# Altium PCB RC_Car.PcbDoc
Units mm, origin at the board's own origin, x right, y up, seen from the top; angles counter-clockwise.
Board outline 99.69 x 74.68 mm, 2 copper layers (Top Layer, Bottom Layer); 21 components, 34 nets, 97 pads, 18 vias.
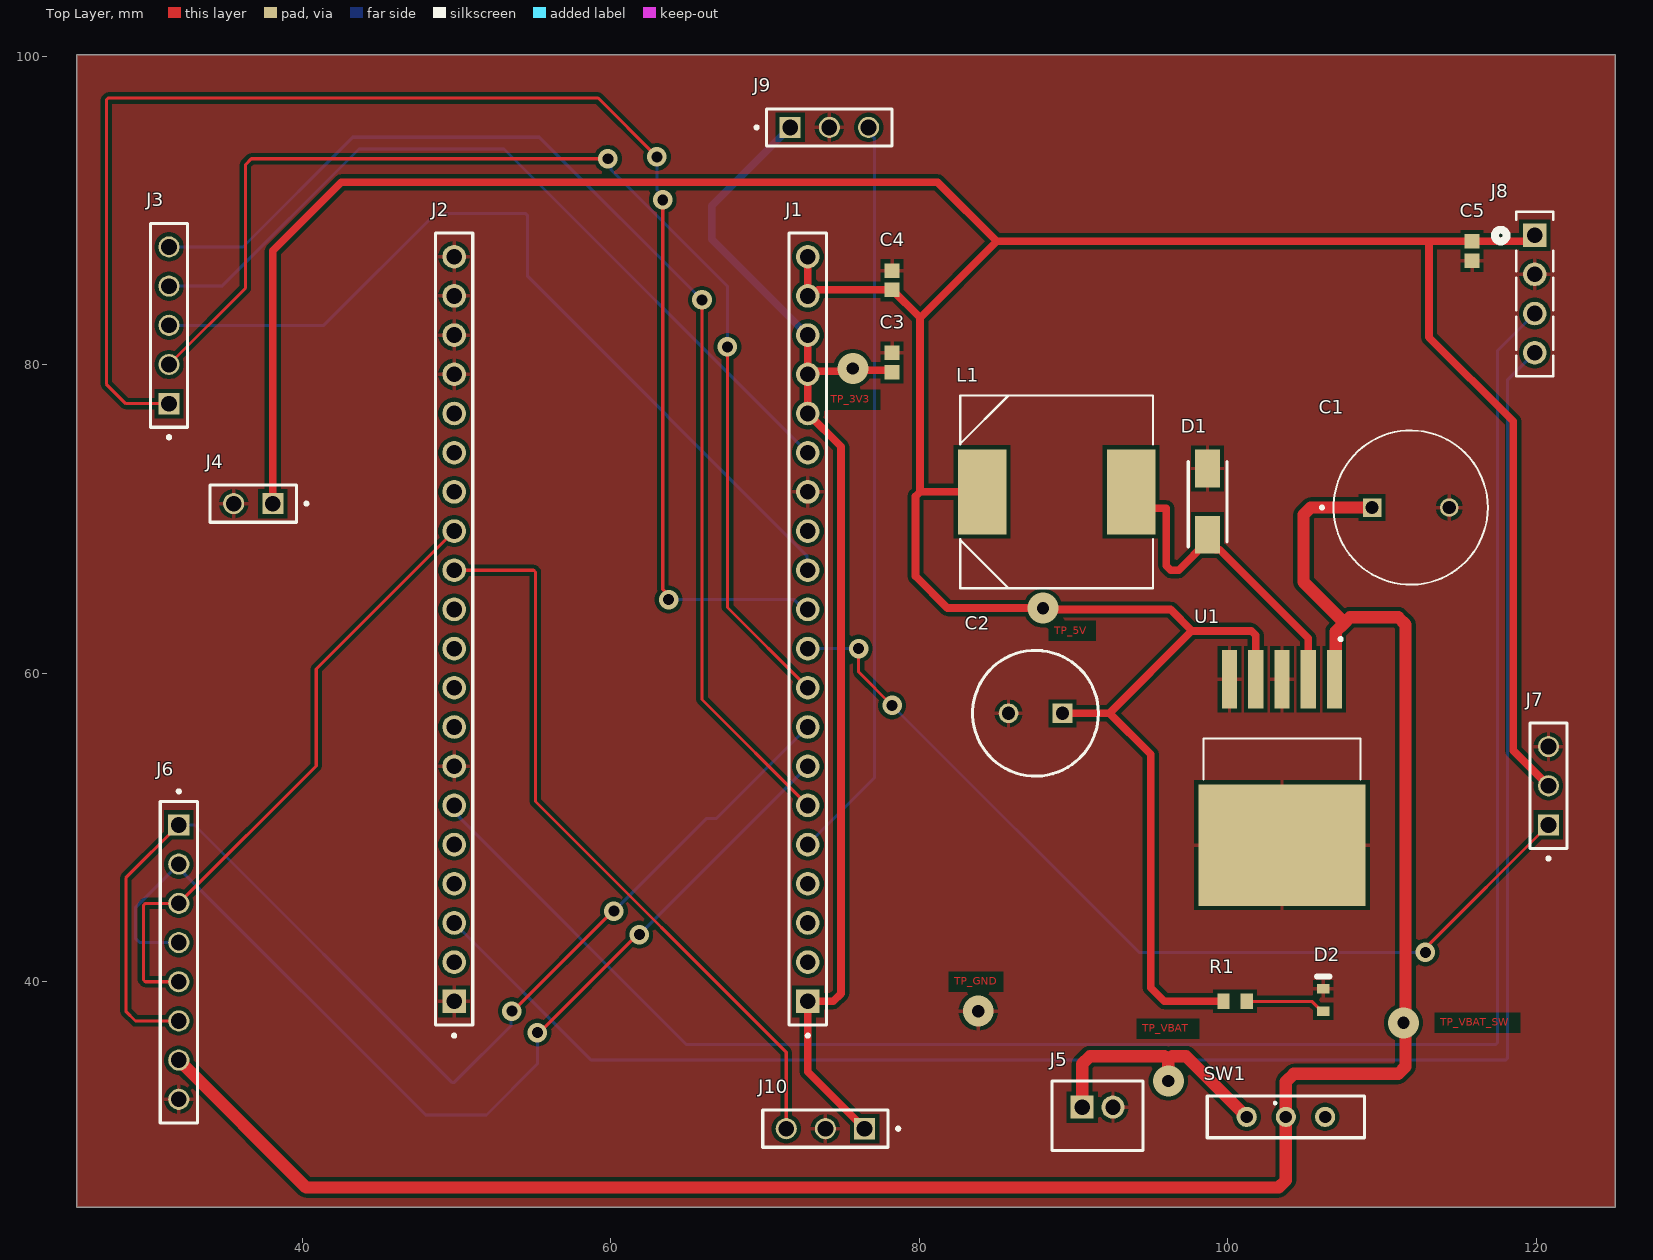
[diagram p0: Top Layer view]
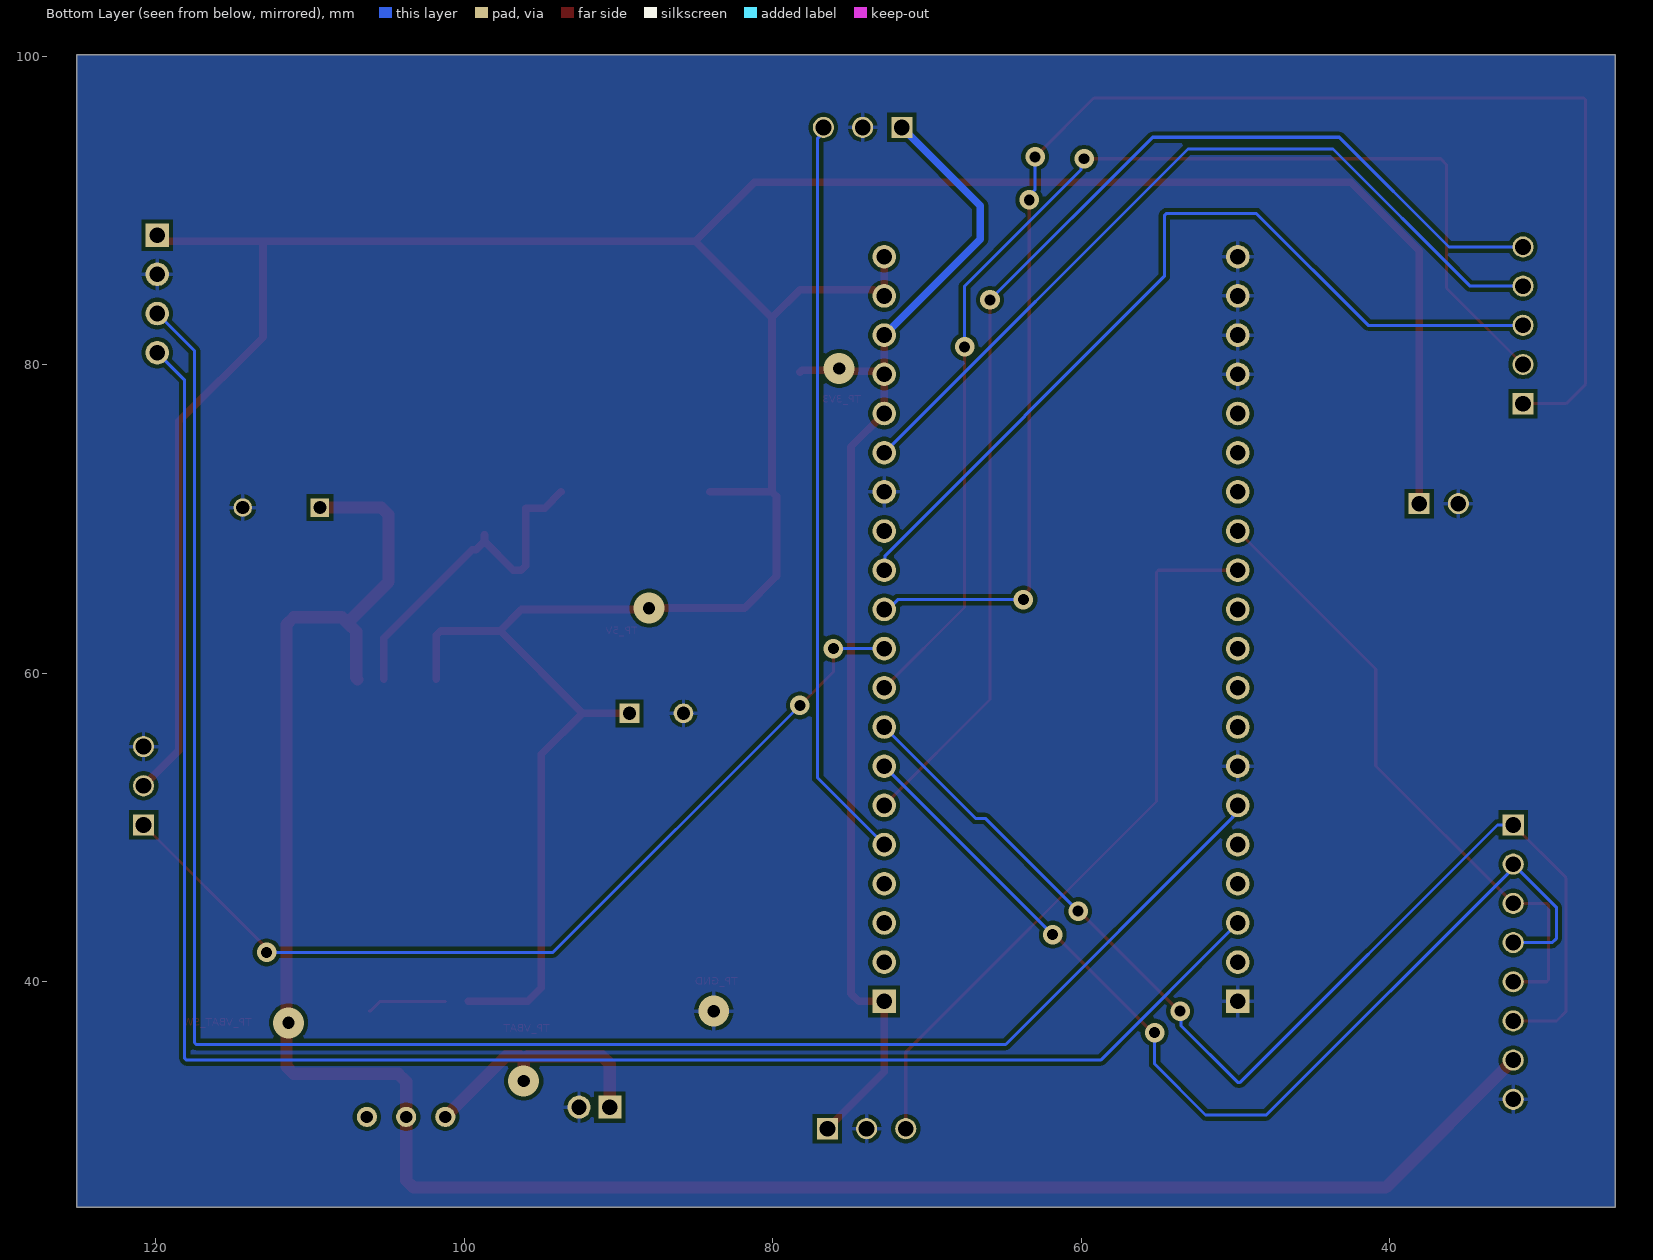
[diagram p1: Bottom Layer view, seen from below]

## Layer stack, top to bottom
Top Solder: solder mask 0.0102, Solder Resist, Dk 3.5
Top Layer: signal copper 0.0356
Dielectric 1: dielectric 0.32, FR-4, Dk 4.8
Bottom Layer: signal copper 0.0356
Bottom Solder: solder mask 0.0102, Solder Resist, Dk 3.5

## Board outline
25.4,25.4 25.4,100.076 125.095,100.076 125.095,25.4

## Design rules (kind name [scope] priority, off if disabled: settings)
Clearance [All] p1: gap=0.254 ignorepadtopadclearanceinfootprint=FALSE
PolygonConnect [All] p1: connectstyle=Relief reliefconductorwidth=0.254 reliefentries=4 polygonreliefangle="90 Angle" airgapwidth=0.254
RoutingVias [All] p1: holewidth=0.711 width=1.27 viastyle="Through Hole" minholewidth=0.711 minwidth=1.27 maxholewidth=0.711 maxwidth=1.27
SolderMaskExpansion [All] p1: expansion=0.102 istentingtop=FALSE
Width [All] p1: maxlimit=2 minlimit=0.2 preferedwidth=0.2 minimp=50.000000 maximp=50.000000 favimp=50.000000
30 further rules are at their usual default settings.

## Components (designator, comment, footprint, x,y, rotation, side; value= is the part's Value field where it differs from the comment)
C1 "EEUFM1E681" CAPPRD500W60D1000H2000 111.847,70.739 r0 top
C2 "EEU-FC1E471" CAPPRD350W65D815H2200 89.281,57.404 r180 top
C3 "Capacitor 100 nF +/-10% 50 V 0603" CAPC1608X90X40NL10T20 78.232,80.137 r90 top value=100nF
C4 "Capacitor 100 nF +/-10% 50 V 0603" CAPC1608X90X40NL10T20 78.232,85.471 r90 top value=100nF
C5 "Capacitor 100 nF +/-10% 50 V 0603" CAPC1608X90X40NL10T20 115.824,87.366 r90 top value=100nF
D1 "CDBA540-HF" DIOM5225X250N 98.679,71.12 r90 top
D2 "TLMS1100-GS08" VISH-TLMX1100_V 106.172,38.825 r90 top
J1 "ESP32 Left Header" SAMTEC_SSQ-120-XX-X-S 72.771,62.865 r90 top
J2 "ESP32 Right Header" SAMTEC_SSQ-120-XX-X-S 49.851,62.865 r90 top
J3 "nRF24 Signals" SAMTEC_SSQ-105-02-T-S 31.369,82.55 r90 top
J4 "nRF24 Power" SAMTEC_SSQ-102-02-T-S 36.83,70.993 r180 top
J5 "Battery Connector" JST-B2B-PH-K-S_V 91.551,31.327 r0 top
J6 "L298N" SAMTEC_SSQ-108-02-T-S 32.004,41.275 r270 top
J7 "Servo Motor" SAMTEC_SSQ-103-02-T-S 120.777,52.705 r90 top
J8 "Tof Sensor" SAMTEC_SSQ-104-02-T-S 119.888,80.772 r270 top
J9 "IR Sensor Left" SAMTEC_SSQ-103-02-T-S 74.168,95.377 r0 top
J10 "IR Sensor Right" SAMTEC_SSQ-103-02-T-S 73.914,30.48 r180 top
L1 "DR127-220-R" INDM125125X800N 88.9,71.755 r0 top
R1 "RC0603JR-13150RL" RESC1608X55X25ML10T15 100.469,38.735 r0 top
SW1 "Power Switch" 450301014042 103.759,31.242 r0 top
U1 "LM2596S-5.0" TO170P1524X483-6N 103.505,53.213 r270 top

## Footprints (in the part's own frame and the unit in brackets; to place one, negate y for a bottom-side part, rotate by r counter-clockwise, add the part's x,y. Pads: shape width x height; smd on the part's side, far side on the other; paste and mask are expansions set on the pad)
450301014042 [mm]
  round 1.308 hole 0.8: 1(0,0) 2(-2.54,0) 3(2.54,0)
  silkscreen extent -5.1,-1.35 5.1,1.35
CAPC1608X90X40NL10T20 [mm] "Chip Capacitor, 2-Leads, Body 1.70x0.90mm, IPC Medium Density"
  rect 0.95x0.95 smd: 1(-0.625,0) 2(0.625,0)
  body extent -0.85,-0.45 0.85,0.45, height 0.9
CAPPRD350W65D815H2200 [mm]
  rect 1.275x1.275 hole 0.85: 1(0,0)
  round 1.275 hole 0.85: 2(3.5,0)
  silkscreen extent -2.33,-4.07 5.82,4.07, body extent -2.49,-4.25 6,4.25, height 22
CAPPRD500W60D1000H2000 [mm]
  round 1.2 hole 0.85: N(2.5,0)
  rect 1.2x1.2 / inner round 1.2 / far side rect 1.2x1.2 hole 0.85: P(-2.5,0)
  silkscreen extent -5.85,-5 5,5, body extent -5,-5 5,5, height 20
DIOM5225X250N [mm]
  rect 2.45x1.6 smd: 1(-2.15,0) 2(2.15,0)
  silkscreen extent -2.95,-1.25 2.6,1.25, body extent -2.6,-1.25 2.6,1.25, height 2.5
INDM125125X800N [mil]
  rect 124x217 smd: 1(-190,0) 2(190,0)
  silkscreen extent -246,-246 246,246
JST-B2B-PH-K-S_V [mm] "Connector, 2-Leads, Body 5.9x4.5mm, Pitch 2mm"
  rect 1.5x1.5 hole 1: 1(-1,0.55)
  round 1.5 hole 1: 2(1,0.55)
  silkscreen extent -2.95,-2.25 2.95,2.25, body extent -2.95,-2.25 2.95,2.25, height 6
RESC1608X55X25ML10T15 [mm] "Chip Resistor, 2-Leads, Body 1.60x0.80mm, IPC Low Density"
  rect 0.8x1 smd: 1(-0.75,0) 2(0.75,0)
  body extent -0.85,-0.45 0.85,0.45, height 0.55
SAMTEC_SSQ-102-02-T-S [mm]
  rect 1.37x1.37 hole 1.02: 01(-1.27,0)
  round 1.37 hole 1.02: 02(1.27,0)
  silkscreen extent -3.54,-1.2 2.8,1.2
SAMTEC_SSQ-103-02-T-S [mm]
  rect 1.37x1.37 hole 1.02: 01(-2.54,0)
  round 1.37 hole 1.02: 02(0,0) 03(2.54,0)
  silkscreen extent -4.81,-1.2 4.07,1.2
SAMTEC_SSQ-104-02-T-S [mil]
  rect 60x60 hole 40: 1(-300,0)
  round 60 hole 40: 2(-200,0) 3(-100,0) 4(0,0)
  silkscreen extent -360,-102 60,47
SAMTEC_SSQ-105-02-T-S [mm]
  rect 1.37x1.37 / inner round 1.37 / far side rect 1.37x1.37 hole 1.02: 01(-5.08,0)
  round 1.37 hole 1.02: 02(-2.54,0) 03(0,0) 04(2.54,0) 05(5.08,0)
  silkscreen extent -7.35,-1.2 6.61,1.2
SAMTEC_SSQ-108-02-T-S [mm]
  rect 1.37x1.37 / inner round 1.37 / far side rect 1.37x1.37 hole 1.02: 01(-8.89,0)
  round 1.37 hole 1.02: 02(-6.35,0) 03(-3.81,0) 04(-1.27,0) 05(1.27,0) 06(3.81,0) 07(6.35,0) 08(8.89,0)
  silkscreen extent -11.16,-1.2 10.42,1.2
SAMTEC_SSQ-120-XX-X-S [mm]
  rect 1.53x1.53 / inner round 1.53 / far side rect 1.53x1.53 hole 1.02: 01(-24.13,0)
  round 1.53 hole 1.02: 02(-21.59,0) 03(-19.05,0) 04(-16.51,0) 05(-13.97,0) 06(-11.43,0) 07(-8.89,0) 08(-6.35,0) 09(-3.81,0) 10(-1.27,0) 11(1.27,0) 12(3.81,0) 13(6.35,0) 14(8.89,0) 15(11.43,0) 16(13.97,0) 17(16.51,0) 18(19.05,0) 19(21.59,0) 20(24.13,0)
  silkscreen extent -26.45,-1.2 25.66,1.2
TO170P1524X483-6N [mm]
  rect 3.79x0.99 smd: 1(-6.4,3.4) 2(-6.4,1.7) 3(-6.4,0) 4(-6.4,-1.7) 5(-6.4,-3.4)
  rect 7.88x10.84 smd paste-6: 6(4.35,0)
  silkscreen extent -9.1,-5.08 0.09,5.08, body extent -7.18,-5.08 7.18,5.08, height 4.65
VISH-TLMX1100_V [mm] "SMD, 2-Leads, Body 1.6x0.8mm"
  rect 0.6x0.8 smd: 1(-0.725,0) 2(0.725,0)
  silkscreen extent 1.53,-0.4 1.53,0.4, body extent -0.8,-0.4 0.8,0.4, height 0.65

## Part data
C1: "680F 25V Aluminum Electrolytic Capacitors Radial, Can 5000 Hrs @ 105C", Package="RADIAL-2 Panasonic", Check_prices=https://www.snapeda.com/parts/EEUFM1E681/Panasonic/view-part/?ref=eda, Digi-Key_Part_Number=P12390-ND, MF=Panasonic, MP=EEUFM1E681, Purchase-URL=https://pricing.snapeda.com/search?q=EEUFM1E681&ref=eda, SnapEDA_Link=https://www.snapeda.com/parts/EEUFM1E681/Panasonic/view-part/?ref=snap
C2: "Capacitor Polarised", Manufacturer_Name=Panasonic, Mouser Part Number=667-EEU-FC1E471, Arrow Part Number=EEU-FC1E471, Arrow Price/Stock=https://www.arrow.com/en/products/eeu-fc1e471/panasonic?region=europe, Datasheet Link=http://industrial.panasonic.com/cdbs/www-data/pdf/RDF0000/ABA0000C1209.pdf, Height=22mm, Manufacturer_Part_Number=EEU-FC1E471, Mouser Price/Stock=https://www.mouser.co.uk/ProductDetail/Panasonic/EEU-FC1E471?qs=%2FUrJKH1balAe6BYeommeDg%3D%3D
C3 C4 C5: library part CMP-001-00017-6, "Chip Capacitor, 100 nF, +/- 10%, 50 V, 0603 (1608 Metric)", Capacitor Type=Ceramic, Case/Package=0603, Max Operating Temperature=125°C, Min Operating Temperature=-55°C, Tolerance=10%, Voltage Rating=50V, Mounting Technology=SM, Pins=2, RoHS Compliant=True
D1: "Schottky Diode", Manufacturer_Name="Comchip Technology", Mouser Part Number=750-CDBA540-HF, Arrow Part Number=CDBA540-HF, Arrow Price/Stock=https://www.arrow.com/en/products/cdba540-hf/comchip-technology?region=nac, Datasheet Link=https://datasheet.datasheetarchive.com/originals/distributors/DKDS-12/228866.pdf, Height=2.5mm, Manufacturer_Part_Number=CDBA540-HF, Mouser Price/Stock=https://www.mouser.co.uk/ProductDetail/Comchip-Technology/CDBA540-HF?qs=XEIV%2Fho1H6f2kHo2SATLRw%3D%3D
D2: library part CMP-007-00030-2, "Red Led, 20mA, 2.1 V, -40 to 100 degC, 2-Pin SMD (0603), RoHS, Tape and Reel", Case/Package=0603, Colour=Red, Forward Current=20mA, Forward Voltage=2.1V, Manufacturer="Vishay Semiconductor", Max Operating Temperature=100°C, Min Operating Temperature=-40°C, Package Description="2-Pin Surface Mount Device, Body 1.6 x 0.8 mm", Package Quantity=3000, Package Reference=TLMX1100, Power=90mW, Datasheet URL=http://www.vishay.com/docs/83173/tlmb1100.pdf, Datasheet Version="Rev. 2.7, 03/2016", Illumination Colour=Red, Lens Style=Clear, Luminous Intensity=63mcd, Manufacturer URL=http://www.vishay.com/, Mounting Technology=SM, Nominal Vf=2.1V, Packaging=TapeandReel, Pins=2, RoHS Compliant=True, Viewing Angle=160degrees
J1 J2: library part SSQ-120-XX-X-S, "20 Position Receptacle Connector 0.100 (2.54mm) Through Hole Gold", Package=None, Check_prices=https://www.snapeda.com/parts/SSQ-120-22-F-S/Samtec/view-part/?ref=eda, MF=Samtec, MP=SSQ-120-22-F-S, SnapEDA_Link=https://www.snapeda.com/parts/SSQ-120-22-F-S/Samtec/view-part/?ref=snap
J3: library part SSQ-105-02-T-S, "Headers & Wire Housings .100 Tiger Buy Socket Strip, Square Tail", Package=None, Check_prices=https://www.snapeda.com/parts/SSQ-105-02-T-S/Samtec/view-part/?ref=eda, MF=Samtec, MP=SSQ-105-02-T-S, SnapEDA_Link=https://www.snapeda.com/parts/SSQ-105-02-T-S/Samtec/view-part/?ref=snap
J4: library part SSQ-102-02-T-S, "SSQ Series .100 Tiger Buyâ„¢ Socket Strip, Square Tail", Package=None, Availability="In Stock", Check_prices=https://www.snapeda.com/parts/SSQ-102-02-T-S/Samtec+Inc./view-part/?ref=eda, MF="Samtec Inc.", MP=SSQ-102-02-T-S, Price=None, Purchase-URL=https://pricing.snapeda.com/search/part/SSQ-102-02-T-S/?ref=eda, SnapEDA_Link=https://www.snapeda.com/parts/SSQ-102-02-T-S/Samtec+Inc./view-part/?ref=snap
J5: library part CMP-2000-05162-1, "Male Header, Pitch 2 mm, 1 x 2 Position, Height 6 mm, Tail Length 3.4 mm, -25 to 85 degC, RoHS, Bulk", Manufacturer=JST, Datasheet URL=http://datasheet.octopart.com/B2B-PH-K-S%28LF%29%28SN%29-JST-datasheet-8324864.pdf, Datasheet Version=Nov-08, Manufacturer URL=http://www.jst.com/home2.html, No of Positions=2, Pitch=2mm, Style/Orientation=StraightHeader/Plug, Termination=Crimp, Type=ShroudedHeader
J6: library part SSQ-108-02-T-S, "Headers & Wire Housings .100 Tiger Buy Socket Strip, Square Tail", Package=None, Check_prices=https://www.snapeda.com/parts/SSQ-108-02-T-S/Samtec/view-part/?ref=eda, MF=Samtec, MP=SSQ-108-02-T-S, SnapEDA_Link=https://www.snapeda.com/parts/SSQ-108-02-T-S/Samtec/view-part/?ref=snap
J7 J9 J10: library part SSQ-103-02-T-S, "3 Position Receptacle Connector 0.100 (2.54mm) Through Hole, Right Angle Tin", Package=None, Availability="In Stock", Check_prices=https://www.snapeda.com/parts/SSQ-103-02-T-S/Samtec/view-part/?ref=eda, MF=Samtec, MP=SSQ-103-02-T-S, Price=None, Purchase-URL=https://pricing.snapeda.com/search/part/SSQ-103-02-T-S/?ref=eda, SnapEDA_Link=https://www.snapeda.com/parts/SSQ-103-02-T-S/Samtec/view-part/?ref=snap
J8: library part SSQ-104-02-T-S, "Connector", Manufacturer_Name=SAMTEC, Datasheet Link=http://suddendocs.samtec.com/prints/ssq-1xx-xx-xxx-x-xx-xxx-xx-x-mkt.pdf, Manufacturer_Part_Number=SSQ-104-02-T-S
L1: "22ÂµH Shielded Wirewound Inductor 4A 39.1mOhm Nonstandard", Package="Nonstandard Eaton", Digi-Key_Part_Number=513-1044-1-ND, Digi-Key_Purchase_URL=https://www.digikey.com/product-detail/en/eaton-electronics-division/DR127-220-R/513-1044-1-ND/695325?utm_source=snapeda&utm_medium=aggregator&utm_campaign=symbol, MF=Eaton, MP=DR127-220-R, SnapEDA_Link=https://www.snapeda.com/parts/DR127-220-R/Eaton/view-part/2774174/?ref=snap
R1: library part CMP-2000-04317-1, Manufacturer=Yageo, Part Number=RC0603JR-13150RL
SW1: library part 450301014042, Package=None, Availability=Unavailable, MF="{'manufacturer': u'W\xfcrth Elektronik'}", MP=450301014042, Price=None
U1: "SIMPLE SWITCHERÂ® 4.5V to 40V, 3A Low Component Count Step-Down Regulator", Package="TO-263-5 Texas Instruments", Check_prices=https://www.snapeda.com/parts/LM2596S-5.0/NOPB/Texas+Instruments/view-part/?ref=eda, MF="Texas Instruments", MP=LM2596S-5.0/NOPB, SnapEDA_Link=https://www.snapeda.com/parts/LM2596S-5.0/NOPB/Texas+Instruments/view-part/?ref=snap

## Via types
v1: diameter 1.27, hole 0.711, Top Layer to Bottom Layer, 13 vias
v2: diameter 2, hole 0.8, Top Layer to Bottom Layer, 5 vias

## Nets (pads, with @x,y where several pads share a name; then routed paths per layer and width w, separated by ;. In a path a pad name is that pad's centre, name@x,y a point inside that pad or via, vN(x,y) a via of type N, cw(c..) or ccw(c..) an arc to the next point about the centre after c; other vN are vias at no path point)
3V3: C3.1 J1.01 J1.16 J1.17 J1.18 J9.01 J10.01 | length 79.6
  Top Layer w0.5: J1.18 72.771,79.566 J1.17 ; J10.01 72.771,34.163 J1.01 74.422,38.735 74.93,39.243 74.93,74.676 J1.16 J1.17 ; C3.1 78.11,79.634 75.814,79.634 v2(75.692,79.756) 75.501,79.566 72.962,79.566 J1.17
  Bottom Layer w0.5: J9.01 66.548,90.297 66.548,88.138 J1.18
5V: C2.1 C4.1 C5.2 J1.19 J1.20 J4.01 J7.02 J8.1 L1.1 R1.1 U1.4 | length 240
  Top Layer w0.5: J4.01 38.1,87.376 42.545,91.821 81.181,91.821 85.011,87.991 ; J1.20 J1.19 73.05,84.455 73.441,84.846 C4.1 80.049,83.029 ; L1.1 80.049,71.755 ; v2@88.013,64.008 88.14,64.135 96.278,64.135 97.669,62.744 ; v2(88.013,64.222) 81.828,64.222 79.756,66.294 79.756,71.462 80.049,71.755 ; C2.1 92.329,57.404 ; R1.1 95.885,38.735 94.996,39.624 94.996,54.737 92.329,57.404 ; U1.4 101.805,62.451 101.512,62.744 97.669,62.744 ; J8.1 119.487,87.991 C5.2 113.03,87.991 ; J7.02 118.491,54.991 118.491,76.327 113.03,81.788 113.03,87.991 ; 80.049,71.755 80.049,83.029 ; 80.049,83.029 85.011,87.991 ; 85.011,87.991 113.03,87.991 ; 92.329,57.404 97.669,62.744
EN: J1.02
GND: C1.N C2.2 C3.2 C4.2 C5.1 D1.2 D2.2 J1.14 J2.01 J2.07 J2.17 J2.18 J2.19 J2.20 J4.02 J5.2 J6.08 J7.03 J8.2 J9.02 J10.02 U1.3 U1.5 U1.6
  other v2: 83.82,38.1
GPIO0: J2.14
GPIO02: J2.15
GPIO04: J2.13 J6.03 J6.05 | length 41
  Top Layer w0.2: J6.05 29.835,40.005 29.718,40.122 29.718,44.968 29.835,45.085 J6.03 40.912,53.993 40.912,60.276 J2.13
GPIO05: J2.10
GPIO12: J1.13
GPIO13: J1.15 J3.04 | length 53.2
  Bottom Layer w0.2: J3.04 34.798,85.09 43.688,93.98 53.086,93.98 J1.15
GPIO14: J1.12 J3.03 | length 56.8
  Bottom Layer w0.2: J3.03 41.402,82.55 48.641,89.789 54.493,89.789 54.61,89.672 54.61,85.725 72.712,67.623 72.712,66.734 J1.12
GPIO15: J2.16
GPIO16: J2.12 J10.03 | length 48.1
  Top Layer w0.2: J2.12 55.001,66.675 55.118,66.558 55.118,51.689 71.374,35.433 J10.03
GPIO17: J2.11
GPIO18: J2.09
GPIO19: J2.08
GPIO21: J2.06 J8.3 | length 122.6
  Bottom Layer w0.2: J2.06 49.851,51.075 50.18,50.746 50.18,50.658 64.897,35.941 117.358,35.941 117.475,36.058 117.475,80.899 J8.3
GPIO22: J2.03 J8.4 | length 118.5
  Bottom Layer w0.2: J2.03 58.741,34.925 117.993,34.925 118.11,35.042 118.11,78.994 J8.4
GPIO23: J2.02
GPIO25: J1.09 J3.02 | length 78.3
  Top Layer w0.2: J3.02 36.322,84.963 36.322,92.964 36.703,93.345 v1(59.817,93.345) ; v1(67.564,81.153) 67.564,64.262 J1.09
  Bottom Layer w0.2: v1(59.817,93.345) 60.022,93.14 60.022,92.632 67.564,85.09 v1(67.564,81.153)
GPIO26: J1.10 J7.01 | length 60.6
  Top Layer w0.2: v1(76.069,61.595) 76.069,60.075 v1(78.232,57.912) ; v1(112.795,41.91) 112.795,42.183 J7.01
  Bottom Layer w0.2: J1.10 v1(76.069,61.595) ; v1(78.232,57.912) 94.234,41.91 v1(112.795,41.91)
GPIO27: J1.11 J3.01 | length 98.6
  Top Layer w0.2: J3.01 28.575,77.47 27.305,78.74 27.305,97.155 27.432,97.282 59.182,97.282 v1(62.992,93.472) ; v1(63.371,90.682) 63.371,65.443 63.754,65.06 v1(63.754,64.77)
  Bottom Layer w0.2: v1(62.992,93.472) 62.992,91.35 63.371,90.972 v1(63.371,90.682) ; v1(63.754,64.77) 71.9,64.77 72.535,64.135 J1.11
GPIO32: J1.07 J6.02 J6.04 | length 67.1
  Top Layer w0.2: v1(55.245,36.703) 55.372,36.703 61.722,43.053 v1(61.849,43.053)
  Bottom Layer w0.2: J6.04 29.464,42.545 29.21,42.799 29.21,44.831 J6.02 32.004,47.371 48.006,31.369 51.943,31.369 55.245,34.671 v1(55.245,36.703) ; v1(61.849,43.053) J1.07
GPIO33: J1.08 J6.01 J6.06 | length 74.9
  Top Layer w0.2: J6.06 29.2,37.465 28.575,38.09 28.575,46.736 J6.01 ; v1(53.594,38.1) 53.657,38.1 60.134,44.577 v1(60.198,44.577)
  Bottom Layer w0.2: J6.01 33.02,50.165 49.701,33.484 49.867,33.484 53.548,37.165 53.548,38.054 v1(53.594,38.1) ; v1(60.198,44.577) 66.215,50.594 66.85,50.594 J1.08
GPIO34: J1.05 J9.03 | length 48.4
  Bottom Layer w0.2: J1.05 77.089,53.213 77.089,94.679 76.708,95.06 J9.03
GPIO35: J1.06 J3.05 | length 77.5
  Top Layer w0.2: v1(65.913,84.201) 65.913,58.293 J1.06
  Bottom Layer w0.2: J3.05 36.163,87.63 43.275,94.742 55.372,94.742 v1(65.913,84.201)
GPIO36: J1.03
GPIO39: J1.04
NetD1_1: D1.1 L1.2 U1.2 | length 22.2
  Top Layer w0.5: L1.2 94.781,70.7 96.012,70.7 96.012,66.968 96.305,66.675 96.809,66.675 D1.1@98.679,68.545 ; D1.1 D1.1@98.679,68.545 ; U1.2 105.205,62.258 99.468,67.995 99.229,67.995 D1.1@98.679,68.545
NetD2_1: D2.1 R1.2 | length 5.2
  Top Layer w0.2: R1.2 105.437,38.735 106.072,38.1 D2.1
RX: J2.05
TX: J2.04
VBAT: J5.1 SW1.2 | length 16.9
  Top Layer w0.8: J5.1 90.551,34.671 91.059,35.179 95.885,35.179 96.139,34.925 ; v2(96.139,33.571) 96.139,34.925 ; SW1.2 97.282,35.179 96.393,35.179 96.139,34.925
VBAT_SW: C1.P J6.07 SW1.1 U1.1 | length 139.6
  Top Layer w0.8: J6.07 40.259,26.67 103.29,26.67 103.759,27.139 SW1.1 103.759,33.528 104.267,34.036 111.037,34.036 111.506,34.505 111.506,37.211 v2(111.379,37.338) 111.506,37.465 111.506,63.158 111.037,63.627 107.911,63.627 107.549,63.266 ; U1.1 106.992,59.7 106.992,62.708 107.549,63.266 ; C1.P 105.371,70.739 104.902,70.27 104.902,65.913 107.549,63.266
pads on no net: SW1.3

## Polygon pours and split planes (outlines as drawn)
GND on Bottom Layer "GND_L02_P001" (solid, remove dead copper, pour order 1): 25.4,100.076 25.4,25.4 125.095,25.4 125.095,100.076
GND on Top Layer "GND_L01_P000" (solid, remove dead copper, pour order 0): 25.4,100.076 25.4,25.4 125.095,25.4 125.095,100.076

## Other copper
Top Layer:
  text "TP_3V3" at 74.268,77.526 h0.5
  text "TP_5V" at 88.746,62.54 h0.5
  text "TP_GND" at 82.269,39.807 h0.5
  text "TP_VBAT_SW" at 113.765,37.14 h0.5
  text "TP_VBAT" at 94.461,36.759 h0.5